# EAGLE board esquematico (EAGLE 9.2.1)
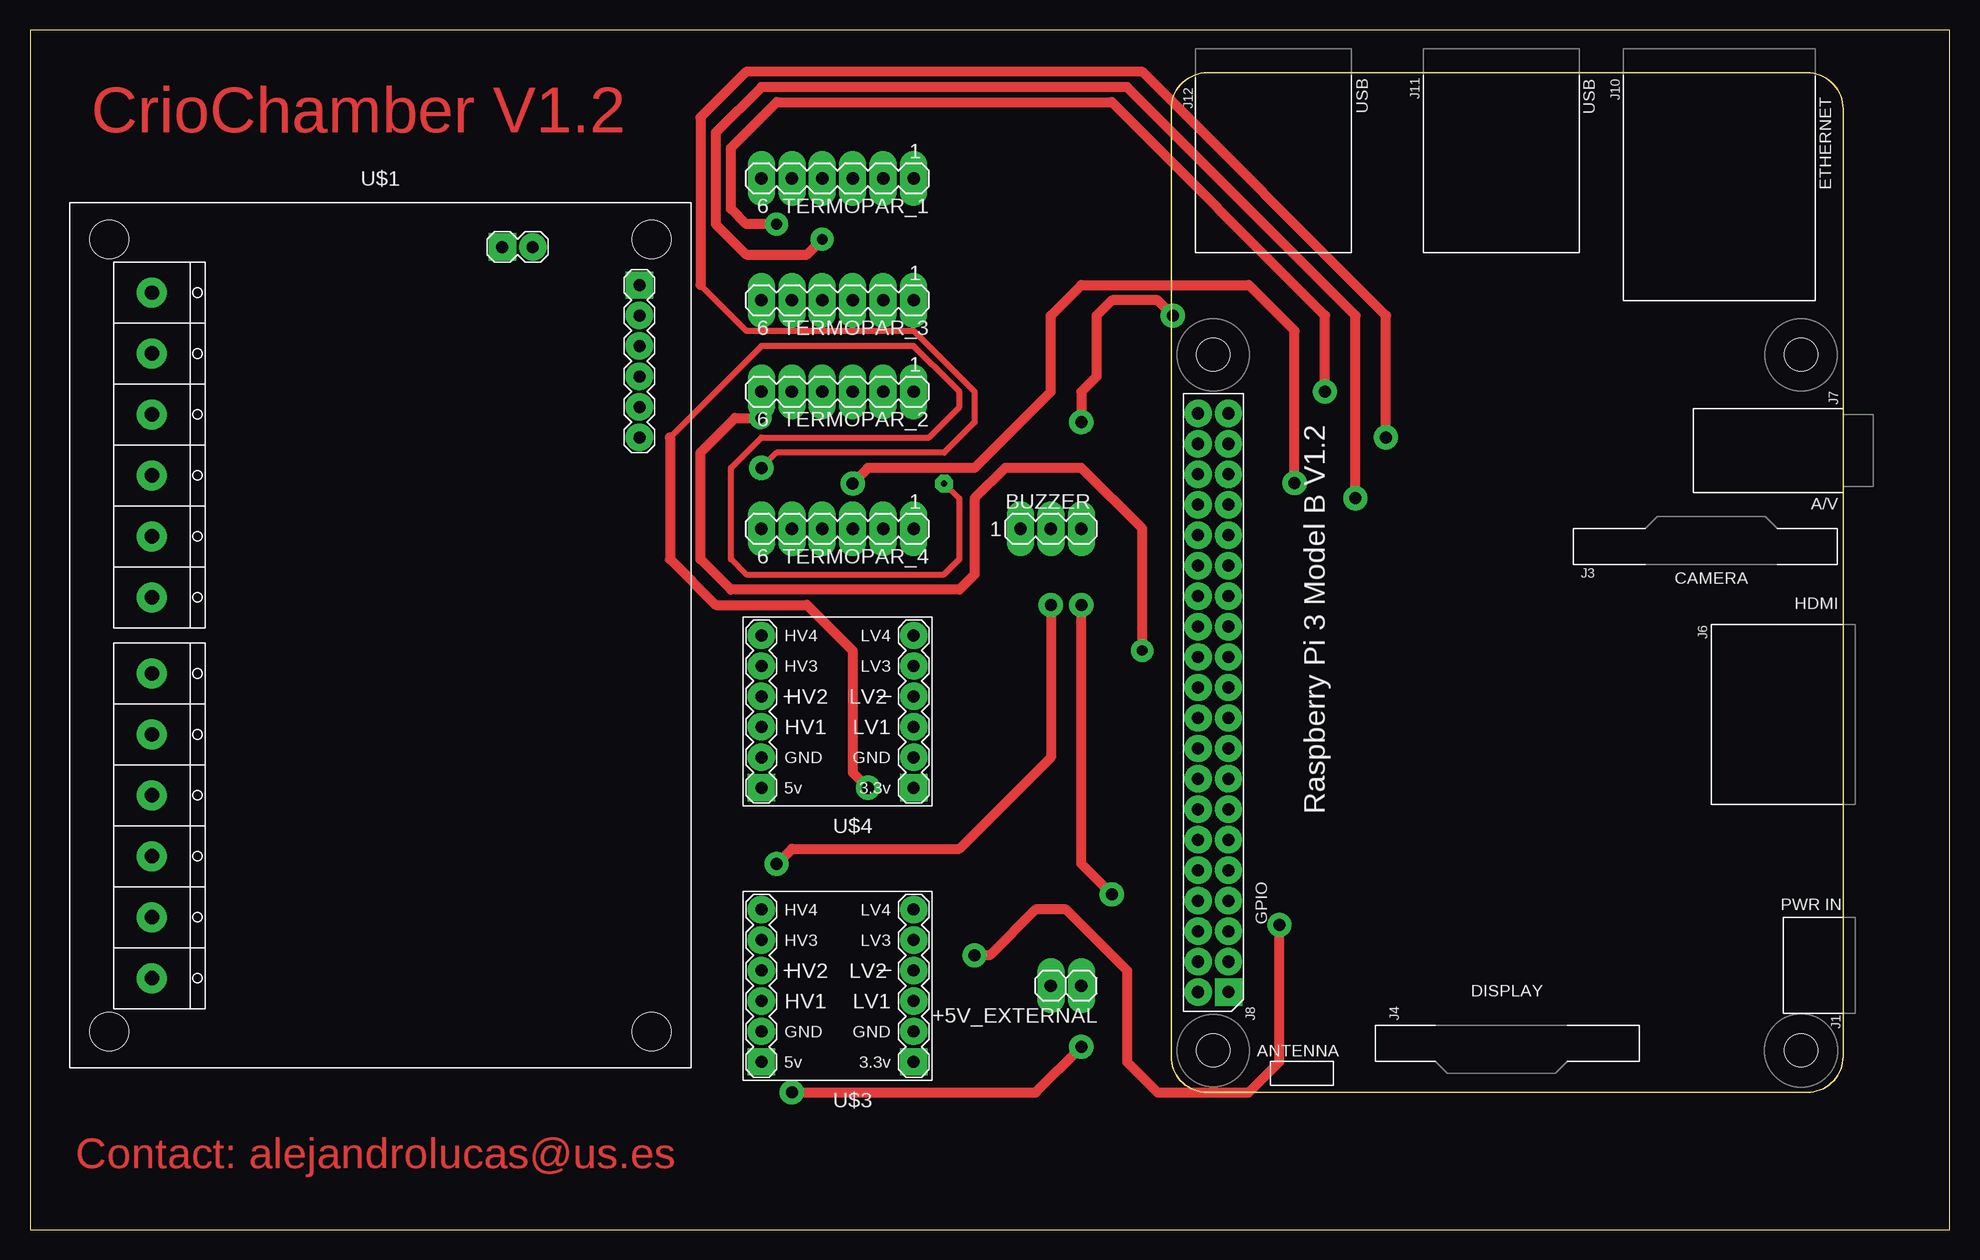
[diagram p0: board, top side]
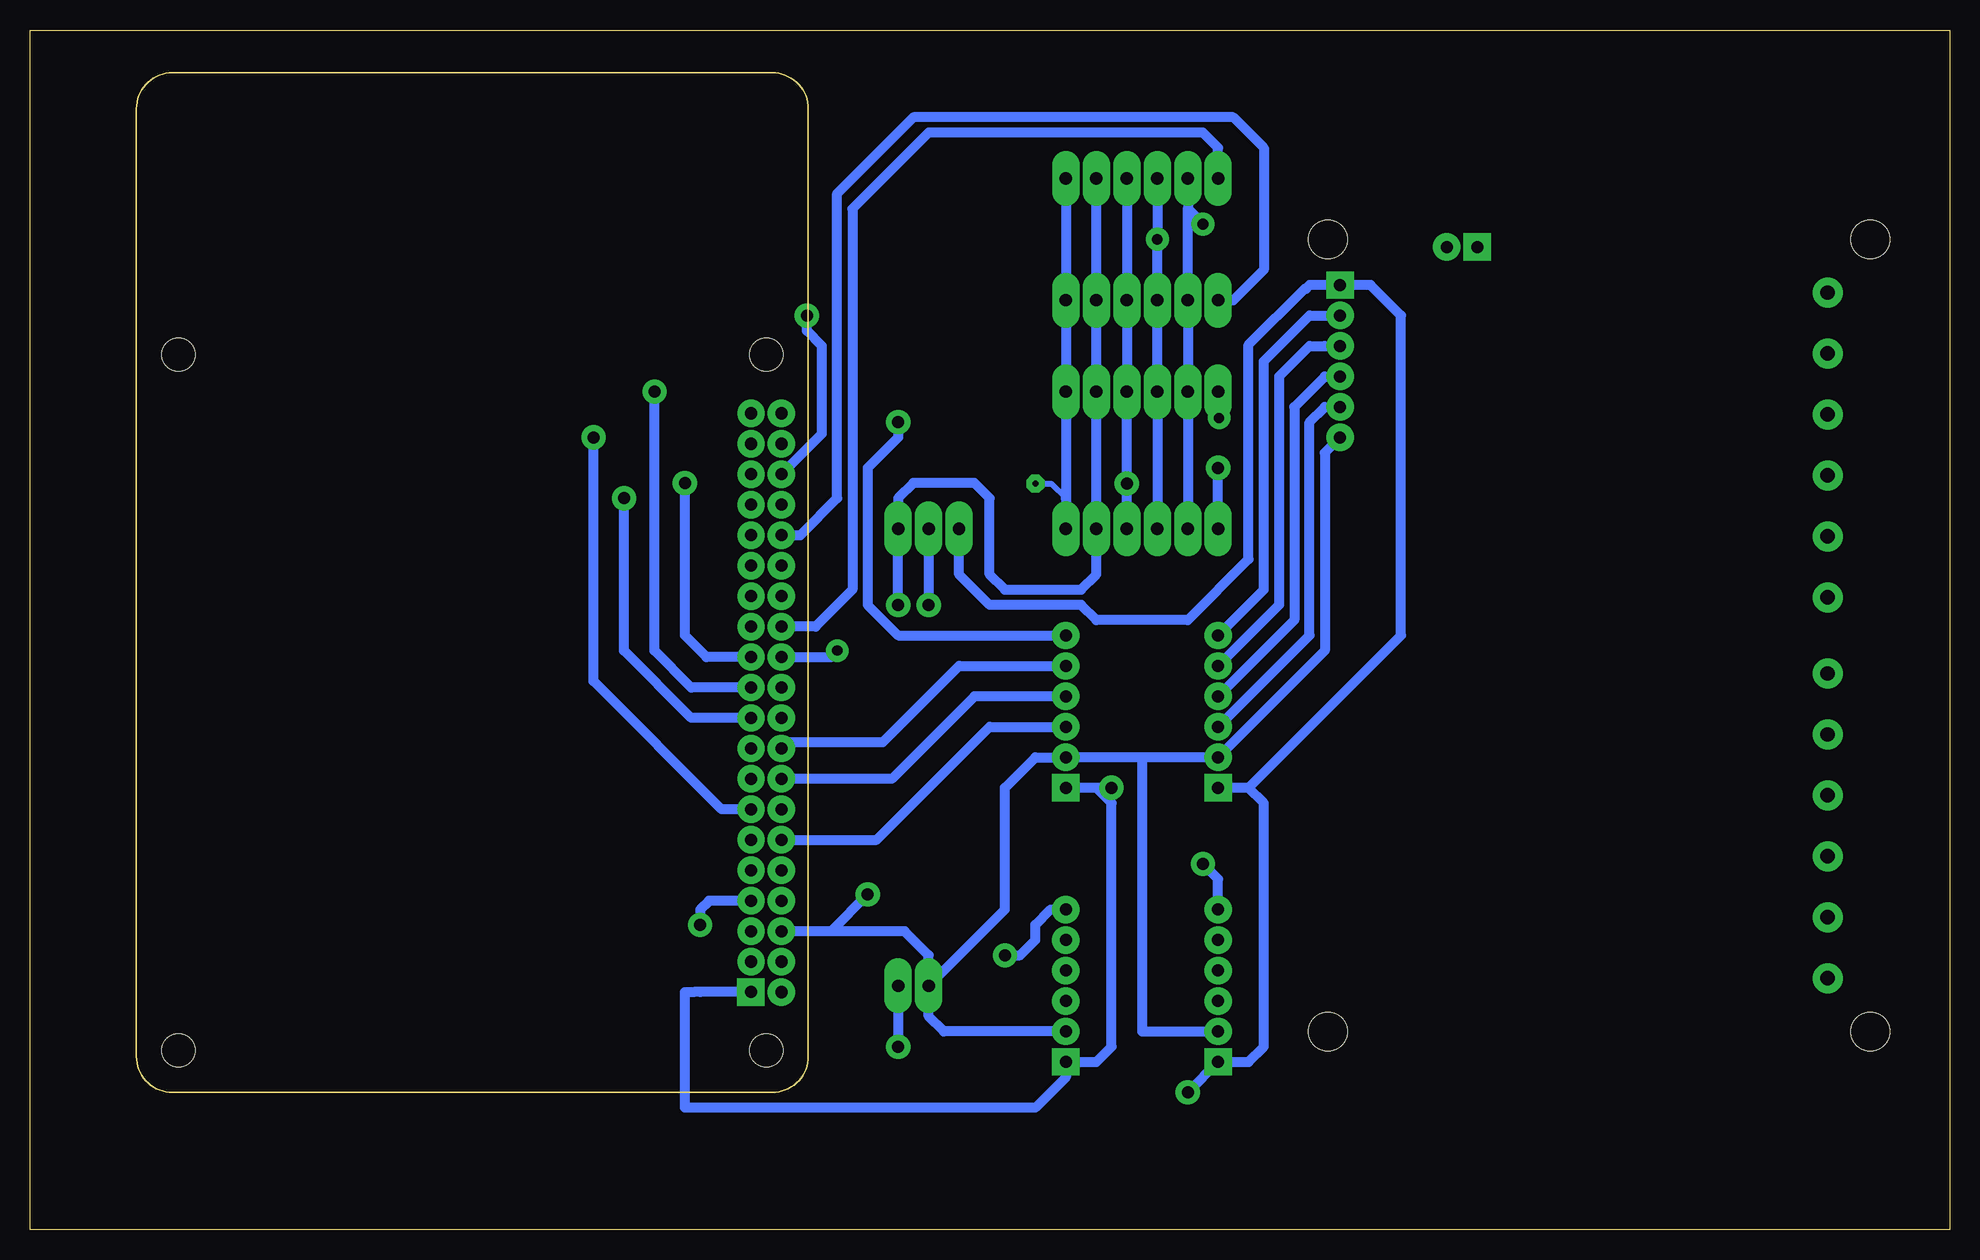
[diagram p1: board, bottom side, seen from below]

Size 160 x 100 mm. Coordinates in mm from the lower left corner, seen from the top.
Outline: 0,0 160,0 160,100 0,100 0,0
Copper layers (1*16): Top 0.035mm / dielectric 1.5mm / Bottom 0.035mm
Design rules "default *": minimum track width 6mil, minimum drill 0.35mm, track to track 6mil, track to pad 6mil, pad to pad 6mil, via to via 6mil, smd to smd 6mil, copper to edge 40mil, drill to drill 6mil, minimum pad ring 25mil, minimum via ring 20mil, stop-mask expansion 4mil, vias tented up to drill 0mil, thermal gap 10mil

## Footprints (pad centres in the part's own frame; a part is rotated, then mirrored left to right if it is on the bottom)
1X02 = drill 1.016 long: 1 -1.27,0; 2 1.27,0
MA03-1 = drill 1.016 long: 1 -2.54,0; 2 0,0; 3 2.54,0
RPI3 = drill 1.016 square: P$1 8.37,51.23 | drill 1.016: P$2 8.357,53.772; P$3 10.897,51.232; P$4 10.897,53.772; P$5 13.437,51.232; P$6 13.437,53.772; P$7 15.977,51.232; P$8 15.977,53.772; P$9 18.517,51.232; P$10 18.517,53.772; P$11 21.057,51.232; P$12 21.057,53.772; P$13 23.597,51.232; P$14 23.597,53.772; P$15 26.137,51.232; P$16 26.137,53.772; P$17 28.677,51.232; P$18 28.677,53.772; P$19 31.217,51.232; P$20 31.217,53.772; P$21 33.757,51.232; P$22 33.757,53.772; P$23 36.297,51.232; P$24 36.297,53.772; P$25 38.837,51.232; P$26 38.837,53.772; P$27 41.377,51.232; P$28 41.377,53.772; P$29 43.917,51.232; P$30 43.917,53.772; P$31 46.457,51.232; P$32 46.457,53.772; P$33 48.997,51.232; P$34 48.997,53.772; P$35 51.537,51.232; P$36 51.537,53.772; P$37 54.077,51.232; P$38 54.077,53.772; P$39 56.617,51.232; P$40 56.617,53.772 | hole 2.75: 3.5,3.5; 61.5,3.5; 3.5,52.5; 61.5,52.5
MA06-1 = drill 1.016 long: 1 -6.35,0; 2 -3.81,0; 3 -1.27,0; 4 1.27,0; 5 3.81,0; 6 6.35,0
RELAY-4-SRD#RC = drill 1 square: J1.1 20.32,29.21; J2.1 8.89,32.385 | drill 1: J1.2 20.32,26.67; J1.3 20.32,24.13; J1.4 20.32,21.59; J1.5 20.32,19.05; J1.6 20.32,16.51; J2.2 11.43,32.385 | drill 1.2 pad 2.5: P1.1 -20.32,28.575; P1.2 -20.32,23.495; P1.3 -20.32,18.415; P1.4 -20.32,13.335; P1.5 -20.32,8.255; P1.6 -20.32,3.175; P2.1 -20.32,-3.175; P2.2 -20.32,-8.255; P2.3 -20.32,-13.335; P2.4 -20.32,-18.415; P2.5 -20.32,-23.495; P2.6 -20.32,-28.575 | hole 3.2: -23.876,33.02; 21.336,33.02; 21.336,-33.02; -23.876,-33.02
LEVEL-SHIFTER-4CH = drill 1 square: J1.1 -5.08,6.35; J2.1 7.62,6.35 | drill 1: J1.2 -5.08,3.81; J1.3 -5.08,1.27; J1.4 -5.08,-1.27; J1.5 -5.08,-3.81; J1.6 -5.08,-6.35; J2.2 7.62,3.81; J2.3 7.62,1.27; J2.4 7.62,-1.27; J2.5 7.62,-3.81; J2.6 7.62,-6.35

## Placement (x,y rotation side)
+5V_EXTERNAL  [1X02]  86.36,20.32 180 top
BUZZER  [MA03-1]  85.09,58.42 0 top
PCB1  RPI3RPI3  [RPI3]  151.13,11.43 90 top
TERMOPAR_1  [MA06-1]  67.31,87.63 180 top
TERMOPAR_2  [MA06-1]  67.31,69.85 180 top
TERMOPAR_3  [MA06-1]  67.31,77.47 180 top
TERMOPAR_4  [MA06-1]  67.31,58.42 180 top
U$1  RELAY-4-SRD#RC  [RELAY-4-SRD#RC]  30.48,49.53 0 top
U$3  LEVEL-SHIFTER-4CH  [LEVEL-SHIFTER-4CH]  68.58,20.32 180 top
U$4  LEVEL-SHIFTER-4CH  [LEVEL-SHIFTER-4CH]  68.58,43.18 180 top

## Library data of the parts
+5V_EXTERNAL = pinhead
BUZZER TERMOPAR_1-TERMOPAR_4 = con-lstb; OC_FARNELL: unknown; OC_NEWARK: unknown
PCB1 = e14_Rpi3_RevA+mirror-pcb
U$1 = diy-modules
U$3 U$4 = diy-modules_modified

## Nets
+5V: +5V_EXTERNAL.1 BUZZER.1 U$1.J1.1 U$3.J2.1 U$4.J2.1
GND: +5V_EXTERNAL.2 BUZZER.3 PCB1.P$6 TERMOPAR_1.2 TERMOPAR_2.2 TERMOPAR_3.2 TERMOPAR_4.2 U$1.J1.6 U$3.J1.2 U$3.J2.2 U$4.J1.2 U$4.J2.2
GND.1: U$3.J1.4
GND.2: U$3.J2.4
HV: U$3.J2.3
LV: U$3.J1.3
N$1: U$1.J1.2 U$4.J2.6
N$2: U$1.J1.3 U$4.J2.5
N$3: U$1.J1.4 U$4.J2.4
N$4: U$1.J1.5 U$4.J2.3
N$5: PCB1.P$12 U$4.J1.3
N$6: PCB1.P$16 U$4.J1.4
N$7: PCB1.P$18 U$4.J1.5
N$8: PCB1.P$36 U$4.J1.6
N$9: PCB1.P$7 U$3.J1.6
N$10: BUZZER.2 U$3.J2.6
N$14: PCB1.P$1 TERMOPAR_1.1 TERMOPAR_2.1 TERMOPAR_3.1 TERMOPAR_4.1 U$3.J1.1 U$4.J1.1
N$16: PCB1.P$23 TERMOPAR_1.3 TERMOPAR_2.3 TERMOPAR_3.3 TERMOPAR_4.3
N$17: PCB1.P$19 TERMOPAR_1.4 TERMOPAR_2.4 TERMOPAR_3.4 TERMOPAR_4.4
N$18: PCB1.P$21 TERMOPAR_1.5 TERMOPAR_2.5 TERMOPAR_3.5 TERMOPAR_4.5
N$19: PCB1.P$13 TERMOPAR_4.6
N$21: PCB1.P$26 TERMOPAR_1.6
N$22: PCB1.P$32 TERMOPAR_3.6
S$20: PCB1.P$24 TERMOPAR_2.6
VCC.2: U$1.J2.2

## Tracks (layer width: path | path; a pad name or v marks a point on that pad's centre or on a via)
+5V  (via drill 1)
  Top 0.813: v87.63,15.24 83.82,11.43 v63.5,11.43
  Bottom 0.813: 58.42,36.83 45.72,49.53 45.72,76.2 48.26,78.74 U$1.J1.1 53.34,78.74 53.65,78.44 53.74,78.44 58.42,73.75 58.42,55.88 63.5,50.8 71.12,50.8 72.39,52.07 80.01,52.07 82.55,54.61 BUZZER.1 | 58.42,36.83 57.15,35.56 57.15,15.24 58.42,13.97 U$3.J2.1 v63.5,11.43 | +5V_EXTERNAL.1 v87.63,15.24 | 58.42,36.83 U$4.J2.1
GND  (via drill 1)
  Top 0.813: v90.17,27.94 87.63,30.48 v87.63,52.07
  Bottom 0.813: 67.31,39.37 U$4.J2.2 52.07,48.26 52.07,64.77 U$1.J1.6 | 67.31,39.37 U$4.J1.2 76.2,39.37 78.74,36.83 78.74,26.67 +5V_EXTERNAL.2 | U$3.J2.2 67.31,16.51 67.31,39.37 | TERMOPAR_1.2 TERMOPAR_3.2 TERMOPAR_2.2 TERMOPAR_4.2 71.12,54.61 72.39,53.34 78.74,53.34 80.01,54.61 80.01,60.96 81.28,62.23 86.36,62.23 87.63,60.96 BUZZER.3 v87.63,52.07 | +5V_EXTERNAL.2 85.09,22.86 87.1,24.87 93.24,24.87 | 93.24,24.87 PCB1.P$6 | +5V_EXTERNAL.2 85.09,17.78 83.82,16.51 U$3.J1.2 | v90.17,27.94 93.24,24.87
N$1
  Bottom 0.813: U$1.J1.2 53.34,76.2 57.15,72.39 57.15,53.34 U$4.J2.6
N$2
  Bottom 0.813: U$4.J2.5 55.88,52.07 55.88,71.12 53.34,73.66 52.07,73.66 U$1.J1.3
N$3
  Bottom 0.813: U$4.J2.4 54.61,50.8 54.61,68.58 52.07,71.12 U$1.J1.4
N$4
  Bottom 0.813: U$4.J2.3 53.34,49.53 53.34,67.31 52.07,68.58 U$1.J1.5
N$5
  Bottom 0.813: PCB1.P$12 89.43,32.49 80.01,41.91 U$4.J1.3
N$6
  Bottom 0.813: PCB1.P$16 88.16,37.57 81.28,44.45 U$4.J1.4
N$7
  Bottom 0.813: PCB1.P$18 96.83,40.64 88.9,40.64 82.55,46.99 U$4.J1.5
N$8  (via drill 1)
  Top 0.813: v87.63,67.31 87.63,69.85 88.9,71.12 88.9,76.2 90.17,77.47 93.98,77.47 v95.25,76.2
  Bottom 0.813: v87.63,67.31 87.63,66.04 90.17,63.5 90.17,52.07 87.63,49.53 U$4.J1.6 | PCB1.P$36 93.98,66.34 93.98,73.66 95.25,74.93 v95.25,76.2
N$9  (via drill 1)
  Top 0.813: v104.14,25.4 104.14,13.97 101.6,11.43 93.98,11.43 91.44,13.97 91.44,21.59 86.36,26.67 83.82,26.67 80.01,22.86 v78.74,22.86
  Bottom 0.813: PCB1.P$7 103.4,27.41 104.14,26.67 v104.14,25.4 | v78.74,22.86 77.47,22.86 76.2,24.13 76.2,25.4 74.93,26.67 U$3.J1.6
N$10  (via drill 1)
  Top 0.813: v85.09,52.07 85.09,39.37 77.47,31.75 63.5,31.75 v62.23,30.48
  Bottom 0.813: BUZZER.2 v85.09,52.07 | U$3.J2.6 60.96,29.21 v62.23,30.48
N$14  (via drill 0.5 pad 1.3, 1)
  Top 0.508: 53.34,66.04 60.96,73.66 73.66,73.66 76.83,70.48 77.47,69.85 77.47,68.58 74.93,66.04 60.96,66.04 58.42,63.5 58.42,55.88 59.69,54.61 76.2,54.61 77.47,55.88 77.47,60.96 77.42,60.96 v76.2,62.18
  Top 0.813: 53.34,66.04 53.34,55.88 57.15,52.07 64.77,52.07 68.58,48.26 68.58,38.1 v69.85,36.83
  Bottom 0.508: v76.2,62.18 74.88,62.18 73.66,60.96
  Bottom 0.813: TERMOPAR_1.1 TERMOPAR_3.1 TERMOPAR_2.1 73.66,60.96 TERMOPAR_4.1 | PCB1.P$1 104.14,19.8 104.66,19.8 105.41,19.8 105.41,10.16 76.2,10.16 73.66,12.7 U$3.J1.1 71.12,13.97 69.85,15.24 69.85,35.56 71.12,36.83 U$4.J1.1 v69.85,36.83
N$16  (via drill 1)
  Top 0.813: v105.41,62.23 105.41,74.93 101.6,78.74 87.63,78.74 85.09,76.2 85.09,69.85 78.74,63.5 69.85,63.5 68.58,62.23 v68.58,62.19
  Bottom 0.813: TERMOPAR_1.3 TERMOPAR_3.3 TERMOPAR_2.3 v68.58,62.19 TERMOPAR_4.3 | PCB1.P$23 103.61,47.73 105.41,49.53 v105.41,62.23
N$17  (via drill 0.9, 1)
  Top 0.813: v110.49,60.96 110.49,76.2 91.44,95.25 60.96,95.25 57.15,91.44 57.15,83.82 59.69,81.28 64.77,81.28 v66.04,82.55
  Bottom 0.813: TERMOPAR_4.4 TERMOPAR_2.4 TERMOPAR_3.4 | 66.04,78.74 TERMOPAR_3.4 | TERMOPAR_1.4 v66.04,82.55 TERMOPAR_3.4 | PCB1.P$19 104.88,42.65 110.49,48.26 v110.49,60.96
N$18  (via drill 0.9, 1)
  Top 0.813: v107.95,69.85 107.95,76.2 90.17,93.98 62.23,93.98 58.42,90.17 58.42,85.09 59.69,83.82 v62.23,83.82
  Bottom 0.813: TERMOPAR_4.5 TERMOPAR_2.5 TERMOPAR_3.5 63.5,85.09 | PCB1.P$21 104.88,45.19 107.95,48.26 v107.95,69.85 | TERMOPAR_1.5 63.5,85.09 | 63.5,85.09 v62.23,83.82
N$19  (via drill 1)
  Top 0.508: 55.88,78.74 59.69,74.93 73.66,74.93 78.74,69.85 78.74,67.31 76.2,64.77 62.23,64.77 v60.96,63.5
  Top 0.813: 55.88,78.74 55.88,92.71 59.69,96.52 92.71,96.52 113.03,76.2 v113.03,66.04
  Bottom 0.813: PCB1.P$13 102.34,35.03 113.03,45.72 v113.03,66.04 | TERMOPAR_4.6 v60.96,63.5
N$21
  Bottom 0.813: TERMOPAR_1.6 60.96,90.17 62.23,91.44 85.09,91.44 91.44,85.09 91.44,53.34 94.51,50.27 PCB1.P$26
N$22
  Bottom 0.813: PCB1.P$32 95.78,57.89 92.71,60.96 92.71,86.36 86.36,92.71 59.69,92.71 57.15,90.17 57.15,80.01 59.69,77.47 TERMOPAR_3.6
S$20  (via drill 0.85)
  Top 0.813: v92.71,48.26 92.71,58.42 87.63,63.5 81.28,63.5 78.74,60.96 78.74,54.61 77.47,53.34 58.42,53.34 55.88,55.88 55.88,64.77 58.77,67.66 v60.89,67.66
  Bottom 0.813: PCB1.P$24 93.24,47.73 v92.71,48.26 | v60.89,67.66 60.96,67.73 TERMOPAR_2.6

## Text on the board
Top: CrioChamber V1.2 | Contact: alejandrolucas@us.es